# Altium PCB modular_pcb.PcbDoc
Units mil, origin at the board's own origin, x right, y up, seen from the top; angles counter-clockwise.
Board outline 1680 x 2735 mil, 2 copper layers (Top Layer, Bottom Layer); 66 components, 32 nets, 199 pads, 254 vias.
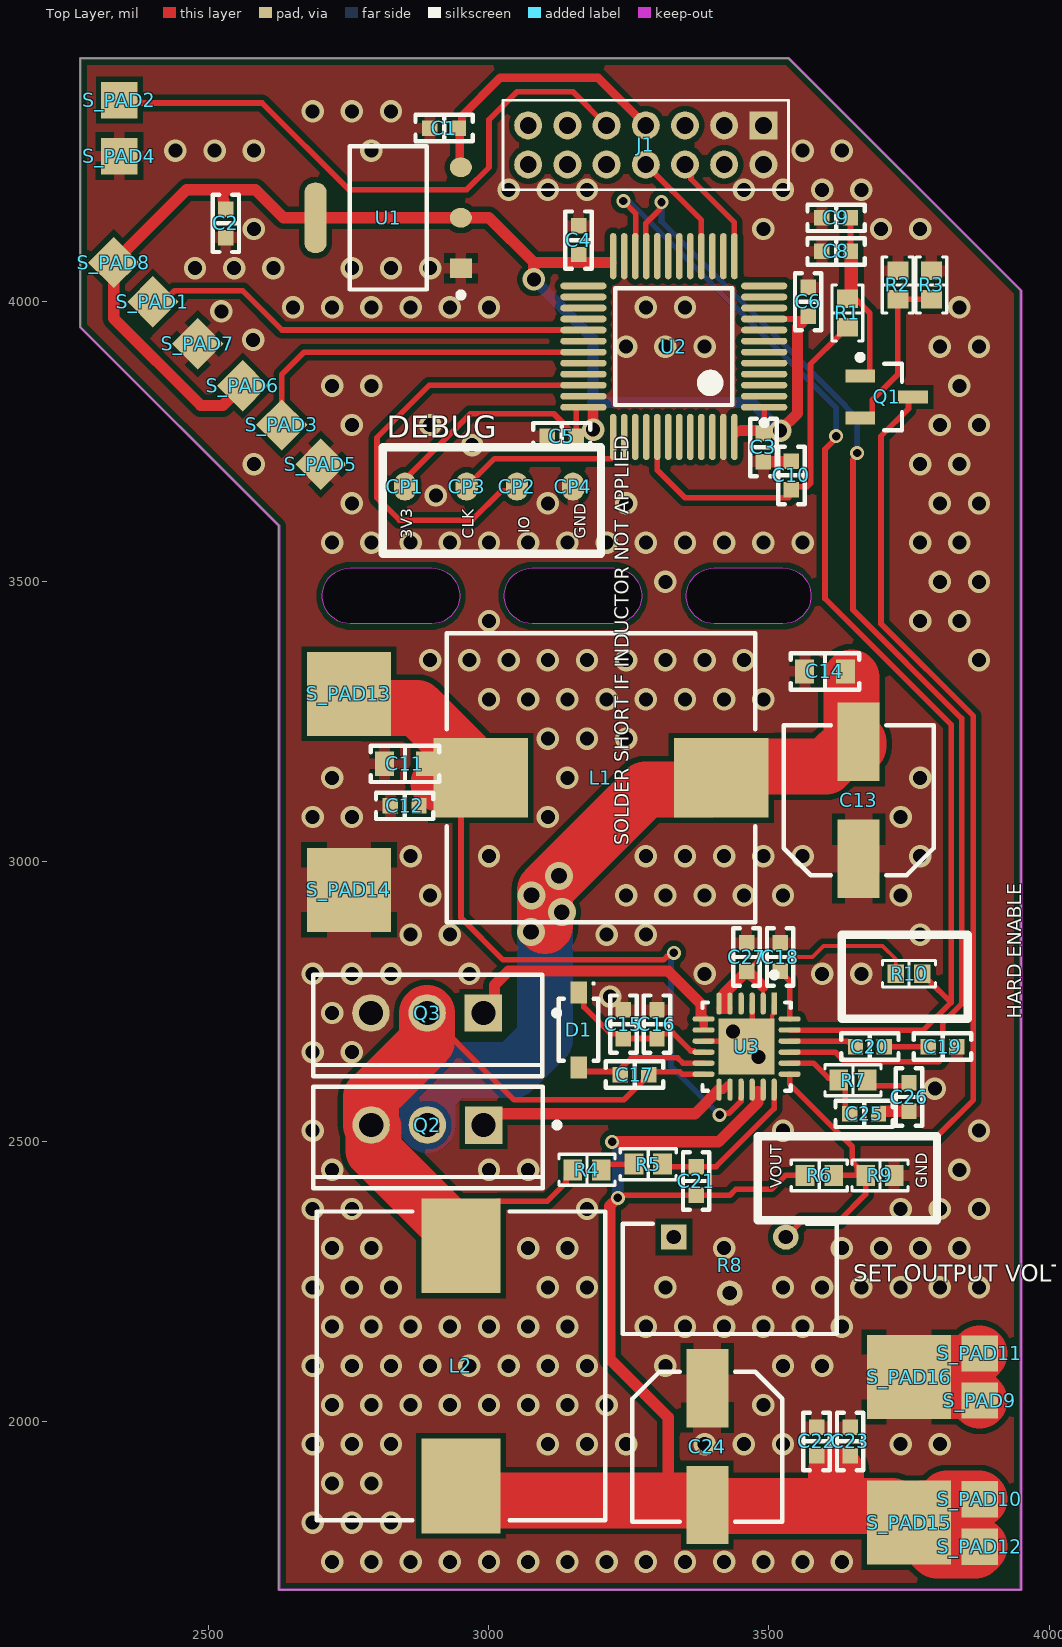
[diagram p0: Top Layer view]
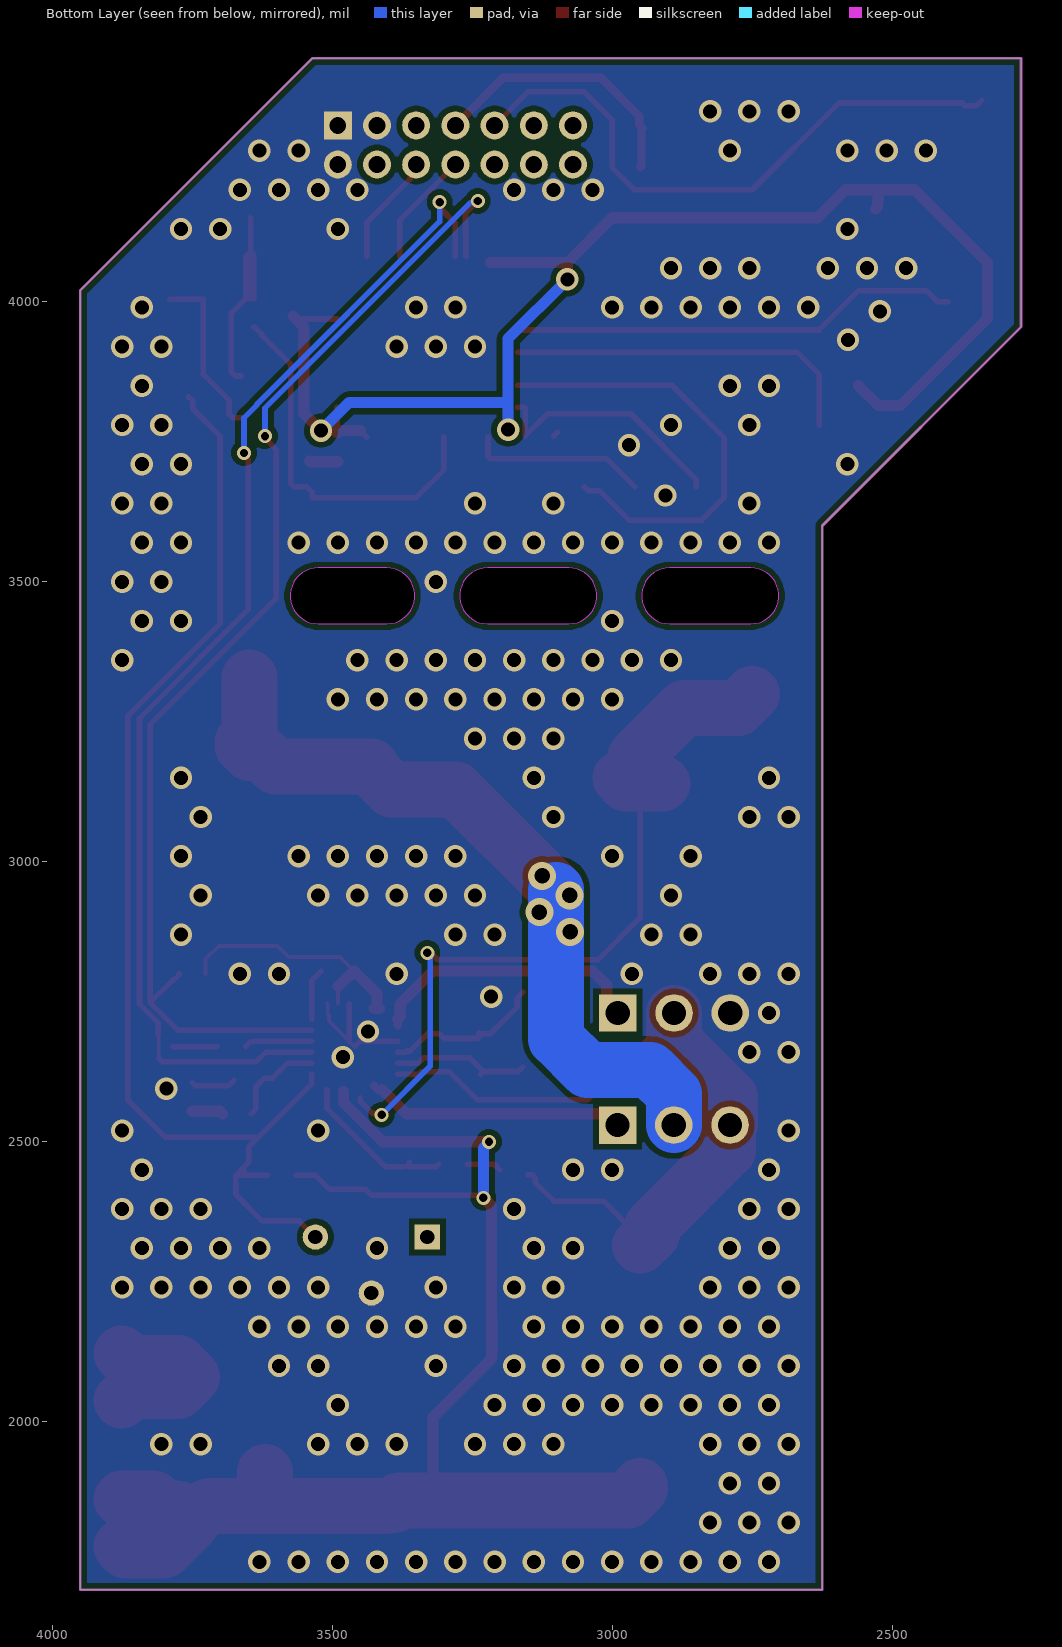
[diagram p1: Bottom Layer view, seen from below]
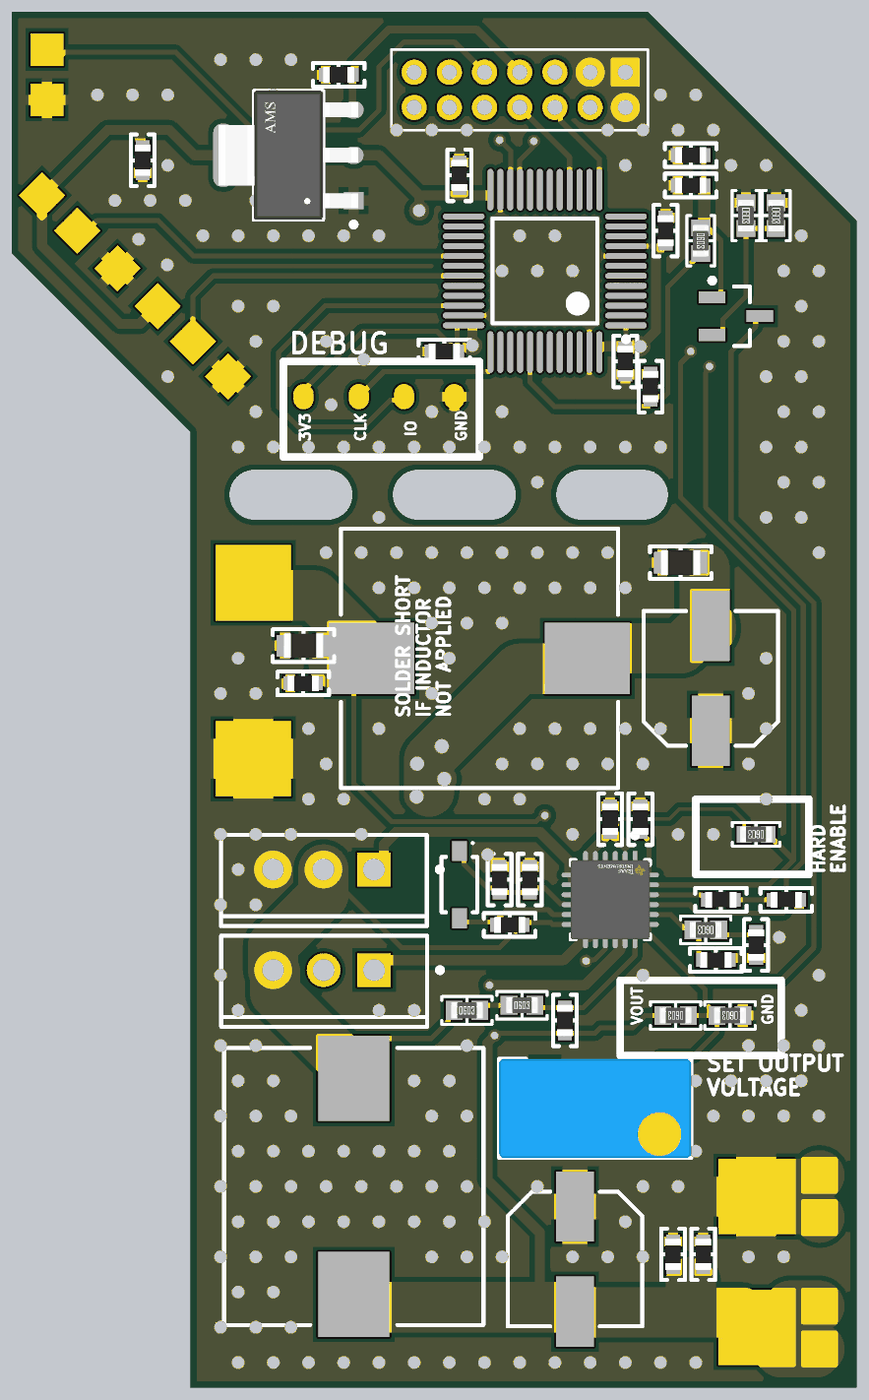
[diagram p2: 3D render of the assembled board from above, using the file's embedded part models]

## Layer stack, top to bottom
Top Solder: solder mask 0.4, Solder Resist, Dk 3.5
Top Layer: signal copper 1.4
Dielectric 1: dielectric 12.6, FR-4, Dk 4.8
Bottom Layer: signal copper 1.4
Bottom Solder: solder mask 0.4, Solder Resist, Dk 3.5

## Board outline
2270,3955 2270,4435 3535,4435 3950,4020 3950,3415 3950,1700 2625,1700 2625,3600
cut-out: 2752.5,3425 cw(c2752.5,3475) 2752.5,3525 2897.5,3525 cw(c2897.5,3475) 2897.5,3425
cut-out: 3077.5,3425 cw(c3077.5,3475) 3077.5,3525 3222.5,3525 cw(c3222.5,3475) 3222.5,3425
cut-out: 3402.5,3425 cw(c3402.5,3475) 3402.5,3525 3525,3525 cw(c3525,3475) 3525,3425

## Design rules (kind name [scope] priority, off if disabled: settings)
Clearance [All] p1: gap=10 ignorepadtopadclearanceinfootprint=TRUE except(5: Arc-Arc Arc-Track Track-Track SMDPad-SMDPad SMDPad-THPad; 8: Arc-SMDPad Track-SMDPad; 13: Arc-THPad Track-THPad; 15: Via-Via)
PolygonConnect CAPACITORS [All vs HasFootprint('CAPAE7266X80M')] p1: thpad.connectstyle=Relief thpad.reliefconductorwidth=10 thpad.reliefentries=4 thpad.polygonreliefangle="90 Angle" thpad.airgapwidth=10 smdpad.connectstyle=Relief smdpad.reliefconductorwidth=50 smdpad.reliefentries=4 smdpad.polygonreliefangle="90 Angle" smdpad.airgapwidth=10 via.connectstyle=Relief via.reliefconductorwidth=10 via.reliefentries=4 via.polygonreliefangle="90 Angle" via.airgapwidth=10
PolygonConnect POWER_PADS [All vs HasFootprint('POWER_PAD')] p2: thpad.connectstyle=Relief thpad.reliefconductorwidth=10 thpad.reliefentries=4 thpad.polygonreliefangle="90 Angle" thpad.airgapwidth=10 smdpad.connectstyle=Relief smdpad.reliefconductorwidth=80 smdpad.reliefentries=4 smdpad.polygonreliefangle="90 Angle" smdpad.airgapwidth=10 smdpad.conductorbypadedge=TRUE smdpad.mindistance=15 smdpad.enablemindistance=FALSE via.connectstyle=Relief via.reliefconductorwidth=10 via.reliefentries=4 via.polygonreliefangle="90 Angle" via.airgapwidth=10
PolygonConnect general [All] p3: thpad.connectstyle=Direct thpad.reliefconductorwidth=50 thpad.reliefentries=4 thpad.polygonreliefangle="90 Angle" thpad.airgapwidth=10 smdpad.connectstyle=Relief smdpad.reliefconductorwidth=20 smdpad.reliefentries=4 smdpad.polygonreliefangle="90 Angle" smdpad.airgapwidth=10 via.connectstyle=Direct via.reliefconductorwidth=50 via.reliefentries=4 via.polygonreliefangle="90 Angle" via.airgapwidth=10
RoutingVias [All] p1: holewidth=12 width=25 viastyle="Through Hole" minholewidth=12 minwidth=20 maxholewidth=70 maxwidth=100
SolderMaskExpansion [All] p1: expansion=4 istentingtop=FALSE
SupplyNets "Schematic Supply Nets" [InNet('VOUT')] p1: voltage=0.000
SupplyNets "Schematic Supply Nets_3" [InNet('GND')] p2: voltage=0.000
SupplyNets "Schematic Supply Nets_7" [InNet('VIN')] p3: voltage=0.000
SupplyNets "Schematic Supply Nets_2" [InNet('3V3')] p4: voltage=0.000
SupplyNets "Schematic Supply Nets_1" [InNet('5V')] p5: voltage=0.000
Width [All] p1: maxlimit=100 minlimit=5 preferedwidth=10 minimp=50.000000 maximp=50.000000 favimp=50.000000
30 further rules are at their usual default settings.

## Classes and differential pairs
component class only_converter: C11 C12 C13 C14 C15 C16 C17 C18 C19 C20 C21 C22 C23 C24 C25 C26 C27 D1 L1 L2 Q2 Q3 R4 R5 R6 R7 R8 R9 R10 S_PAD13 S_PAD14 S_PAD15 S_PAD16 U3
component class BTT_toolhead_expansion: C1 C2 C3 C4 C5 C6 C8 C9 C10 CP1 CP2 CP3 CP4 J1 Q1 R1 R2 R3 S_PAD1 S_PAD2 S_PAD3 S_PAD4 S_PAD5 S_PAD6 S_PAD7 S_PAD8 S_PAD9 S_PAD10 S_PAD11 S_PAD12 U1 U2

## Components (designator, comment, footprint, x,y, rotation, side; value= is the part's Value field where it differs from the comment)
C1 "Capacitor" "CAP FILM 0603_1608" 2920,4310 r0 top value=10u
C2 "Capacitor" "CAP FILM 0603_1608" 2530,4140 r90 top value=10u
C3 "Capacitor" "CAP FILM 0603_1608" 3490,3740 r270 top value=100n
C4 "Capacitor" "CAP FILM 0603_1608" 3160,4110 r90 top value=1p
C5 "Capacitor" "CAP FILM 0603_1608" 3130,3760 r180 top value=100n
C6 "Capacitor" "CAP FILM 0603_1608" 3570,4000 r90 top value=100n
C8 "Capacitor" "CAP FILM 0603_1608" 3620,4090 r0 top value=100n
C9 "Capacitor" "CAP FILM 0603_1608" 3620,4150 r0 top value=1u
C10 "Capacitor" "CAP FILM 0603_1608" 3540,3690 r270 top value=100n
C11 "Capacitor" "CAP FILM 0805" 2850,3175 r0 top value=10u
C12 "Capacitor" "CAP FILM 0603_1608" 2849.41,3100 r0 top value=470n
C13 "Capacitor" CAPAE7266X80M 3660,3110 r90 top value=150u
C14 "Capacitor" "CAP FILM 0805" 3600,3340 r0 top value=10u
C15 "Capacitor" "CAP FILM 0603_1608" 3240,2710 r270 top value=1u
C16 "Capacitor" "CAP FILM 0603_1608" 3300,2710 r270 top value=1u
C17 "Capacitor" "CAP FILM 0603_1608" 3260,2620 r180 top value=100n
C18 "Capacitor" "CAP FILM 0603_1608" 3520,2830 r270 top value=100n
C19 "Capacitor" "CAP FILM 0603_1608" 3810,2670 r180 top value=100n
C20 "Capacitor" "CAP FILM 0603_1608" 3680,2670 r180 top value=100n
C21 "Capacitor" "CAP FILM 0603_1608" 3370,2430 r270 top value=470n
C22 "Capacitor" "CAP FILM 0603_1608" 3585,1965 r270 top value=10u
C23 "Capacitor" "CAP FILM 0603_1608" 3645,1965 r270 top value=10u
C24 "Capacitor" CAPAE7266X80M 3390,1955.67 r270 top value=150u
C25 "Capacitor" "CAP FILM 0603_1608" 3670,2550 r180 top value=10p
C26 "Capacitor" "CAP FILM 0603_1608" 3750,2580 r90 top value=1n
C27 "Capacitor" "CAP FILM 0603_1608" 3460,2830 r270 top value=100n
CP1 "CONNECT_PAD" ROUND_SMALL 2850,3670 r180 top
CP2 "CONNECT_PAD" ROUND_SMALL 3050,3670 r180 top
CP3 "CONNECT_PAD" ROUND_SMALL 2960,3670 r180 top
CP4 "CONNECT_PAD" ROUND_SMALL 3150,3670 r180 top
D1 "Zener Diode" SODFL375X135-2N 3160,2700 r270 top
J1 "BTT header 2x7" "BTT connector 2x7 THT" 3490,4315 r270 top
L1 "Inductor" INDP135128X65N 3200,3150 r0 top value=2.2u
L2 "Inductor" INDP135128X65N 2950,2100 r270 top value=2.2u
Q1 "BSS806N" INF-PG-SOT23_M 3710,3830 r0 top
Q2 "STP80NF55-06" STM-TO-220A-3 2890,2530 r270 top
Q3 "STP80NF55-06" STM-TO-220A-3 2889.61,2730 r270 top
R1 "Resistor" "RES 0603_1608" 3640,3980 r270 top value=470R
R2 "Resistor" "RES 0603_1608" 3730,4030 r270 top value=999M
R3 "Resistor" "RES 0603_1608" 3790,4030 r270 top value=360R
R4 "Resistor" "RES 0603_1608" 3175,2450 r0 top value=1K
R5 "Resistor" "RES 0603_1608" 3284.41,2460 r0 top value=1K
R6 "Resistor" "RES 0603_1608" 3590,2440 r180 top value=12k
R7 "Resistor" "RES 0603_1608" 3650,2610 r180 top value=3.48K
R8 "T93YB103KT20" FP-T93YB-MFG 3430,2255.2 r90 top
R9 "Resistor" "RES 0603_1608" 3698.13,2440 r180 top value=6k
R10 "Resistor" "RES 0603_1608 RF" 3750,2800 r180 top value=1K
S_PAD1 "SOLDER_PAD" PAD_SQUARE 2400,4000 r45 top
S_PAD2 "SOLDER_PAD" PAD_SQUARE 2340,4360 r90 top
S_PAD3 "SOLDER_PAD" PAD_SQUARE 2630,3780 r45 top
S_PAD4 "SOLDER_PAD" PAD_SQUARE 2340,4260 r90 top
S_PAD5 "SOLDER_PAD" PAD_SQUARE 2700,3710 r45 top
S_PAD6 "SOLDER_PAD" PAD_SQUARE 2560,3850 r45 top
S_PAD7 "SOLDER_PAD" PAD_SQUARE 2480,3925 r45 top
S_PAD8 "SOLDER_PAD" PAD_SQUARE 2330,4070 r45 top
S_PAD9 "SOLDER_PAD" PAD_SQUARE 3876,2038 r90 top
S_PAD10 "SOLDER_PAD" PAD_SQUARE 3876,1862 r180 top
S_PAD11 "SOLDER_PAD" PAD_SQUARE 3876,2122 r180 top
S_PAD12 "SOLDER_PAD" PAD_SQUARE 3876,1777 r180 top
S_PAD13 "SOLDER_PAD" POWER_PAD 2750,3300 r90 top
S_PAD14 "SOLDER_PAD" POWER_PAD 2750,2950 r90 top
S_PAD15 "SOLDER_PAD" POWER_PAD 3750,1820 r180 top
S_PAD16 "SOLDER_PAD" POWER_PAD 3750,2080 r180 top
U1 "AMS1117-3.3" FP-AMS1117-IPC_C 2820,4150 r180 top
U2 "STM32F103C6T6A" STM-LQFP48_M 3330,3920 r180 top
U3 "LM25141QRGERQ1" FP-RGE0024J-IPC_A 3460,2670 r270 top

## Footprints (in the part's own frame and the unit in brackets; to place one, negate y for a bottom-side part, rotate by r counter-clockwise, add the part's x,y. Pads: shape width x height; smd on the part's side, far side on the other; paste and mask are expansions set on the pad)
"BTT connector 2x7 THT" [mil]
  rect 50x50 hole 30: 1(0,0)
  round 50 hole 30: 2(0,-70) 3(0,-140) 4(0,-210) 5(0,-280) 6(0,-350) 7(0,-420) 8(70,-420) 9(70,-350) 10(70,-280) 11(70,-210) 12(70,-140) 13(70,-70) 14(70,0)
  silkscreen extent -45,-465 115,45
"CAP FILM 0603_1608" [mm] "Chip Capacitor, 2-Leads, Body 1.60x0.80mm, IPC Medium Density"
  rect 0.7x0.7 smd: 1(-0.65,0) 2(0.65,0)
  silkscreen extent -1.3,-0.6 1.3,0.6, body extent -0.8,-0.4 0.8,0.4, height 0.7
"CAP FILM 0805" [mm] "J2, Film Capacitor PPS , 2-Leads, Body 2.00x1.25mm, IPC Medium Density"
  rect 0.85x1.1 smd: 1(-0.925,0) 2(0.925,0)
  silkscreen extent -1.55,-0.82 1.55,0.82, body extent -1,-0.62 1,0.62, height 1.2
CAPAE7266X80M [mm] "Aluminum Electrolytic Capacitor, Body 6.60x6.60x8.00mm, IPC Low Density"
  rect 3.55x1.9 smd: 1(-2.65,0) 2(2.65,0)
  silkscreen extent -3.4,-3.4 3.4,3.4, body extent -3.4,-3.4 3.4,3.4, height 8
FP-AMS1117-IPC_C [mm]
  rect 1.004x0.872 smd paste+0 mask+0: 1(-3.295,2.29)
  rrect100% 1.004x0.872 smd paste+0 mask+0: 2(-3.295,0) 3(-3.295,-2.29)
  rrect87% 1.004x3.182 smd paste+0 mask+0: 4(3.295,0)
  silkscreen extent -3.42,-3.25 1.75,3.62, body extent -3.9,-3.35 3.9,3.35, height 0.25
FP-RGE0024J-IPC_A [mm]
  rect 1.01x0.242 smd paste+0 mask+0: 1(-1.951,1.25)
  rrect100% 1.01x0.242 smd paste+0 mask+0: 2(-1.951,0.75) 3(-1.951,0.25) 4(-1.951,-0.25) 5(-1.951,-0.75) 6(-1.951,-1.25) 13(1.951,-1.25) 14(1.951,-0.75) 15(1.951,-0.25) 16(1.951,0.25) 17(1.951,0.75) 18(1.951,1.25)
  rrect100% 0.242x1.01 smd paste+0 mask+0: 7(-1.25,-1.951) 8(-0.75,-1.951) 9(-0.25,-1.951) 10(0.25,-1.951) 11(0.75,-1.951) 12(1.25,-1.951) 19(1.25,1.951) 20(0.75,1.951) 21(0.25,1.951) 22(-0.25,1.951) 23(-0.75,1.951) 24(-1.25,1.951)
  rect 2.55x2.55 smd paste-1000 mask+0: 25(0,0)
  silkscreen extent -3.38,-2 2,2, body extent -2.96,-2.96 2.96,2.96, height 0.25
FP-T93YB-MFG [mm]
  rect 1.15x1.15 hole 0.65 paste-2539.97 mask+0: 1(1.9,2.54)
  round 1.15 hole 0.65 paste-2539.97 mask+0: 2(-0.64,0) 3(1.9,-2.54)
  silkscreen extent -2.5,-4.85 2.5,4.85, body extent -2.6,-4.95 2.6,4.95, height 0.25
INDP135128X65N [mm] "Precision Wire Wound Inductor, 2-Leads, Body 13.50x12.75mm, IPC Medium Density"
  rect 4.3x3.6 smd: 1(-5.45,0) 2(5.45,0)
  silkscreen extent -7,-6.55 7,6.55, body extent -7,-6.55 7,6.55, height 6.5
INF-PG-SOT23_M [mm] "SOT23, 3-Leads, Body 2.9x1.3mm, Pitch 0.95mm, IPC Low Density"
  rect 1.35x0.6 smd: 1(-1.2,0.95) 2(-1.2,-0.95) 3(1.2,0)
  silkscreen extent -1.32,-1.5 0.7,1.92, body extent -0.7,-1.5 0.7,1.5, height 1.1
PAD_SQUARE [mil]
  rect 65x65 smd paste-99999: 1(0,0)
POWER_PAD [mil]
  rect 150x150 smd paste-99999: 1(0,0)
"RES 0603_1608" [mm] "Chip Resistor, 2-Leads, Body 1.60x0.80mm, IPC Medium Density"
  rect 0.85x0.95 smd: 1(-0.65,0) 2(0.65,0)
  silkscreen extent -1.27,-0.7 1.27,0.7, body extent -0.8,-0.4 0.8,0.4, height 0.45
"RES 0603_1608 RF" [mm] "Chip Resistor, 2-Leads, Body 1.60x0.80mm, IPC High Density"
  rect 0.75x0.85 smd: 1(-0.6,0) 2(0.6,0)
  silkscreen extent -1.2,-0.6 1.2,0.6, body extent -0.8,-0.4 0.8,0.4, height 0.45
ROUND_SMALL [mil]
  oval 40x50 smd paste-99999: 1(0,0)
SODFL375X135-2N [mm] "SODFL, 2-Leads, Body 1.60x3.75mm, IPC Medium Density"
  rect 1x0.75 smd: 1(-1.7,0) 2(1.7,0)
  silkscreen extent -2.15,-0.9 1.4,0.9, body extent -1.4,-0.9 1.4,0.9, height 1.35
STM-LQFP48_M [mm] "QFP, 48-Leads, Body 7x7mm, Pitch 0.5mm, IPC Low Density"
  oval 2.1x0.3 smd: 1(-4.1,2.75) 2(-4.1,2.25) 3(-4.1,1.75) 4(-4.1,1.25) 5(-4.1,0.75) 6(-4.1,0.25) 7(-4.1,-0.25) 8(-4.1,-0.75) 9(-4.1,-1.25) 10(-4.1,-1.75) 11(-4.1,-2.25) 12(-4.1,-2.75) 25(4.1,-2.75) 26(4.1,-2.25) 27(4.1,-1.75) 28(4.1,-1.25) 29(4.1,-0.75) 30(4.1,-0.25) 31(4.1,0.25) 32(4.1,0.75) 33(4.1,1.25) 34(4.1,1.75) 35(4.1,2.25) 36(4.1,2.75)
  oval 0.3x2.1 smd: 13(-2.75,-4.1) 14(-2.25,-4.1) 15(-1.75,-4.1) 16(-1.25,-4.1) 17(-0.75,-4.1) 18(-0.25,-4.1) 19(0.25,-4.1) 20(0.75,-4.1) 21(1.25,-4.1) 22(1.75,-4.1) 23(2.25,-4.1) 24(2.75,-4.1) 37(2.75,4.1) 38(2.25,4.1) 39(1.75,4.1) 40(1.25,4.1) 41(0.75,4.1) 42(0.25,4.1) 43(-0.25,4.1) 44(-0.75,4.1) 45(-1.25,4.1) 46(-1.75,4.1) 47(-2.25,4.1) 48(-2.75,4.1)
  silkscreen extent -4.23,-2.65 2.65,3.57, body extent -3.5,-3.5 3.5,3.5, height 1.6
STM-TO-220A-3 [mm] "FM, 3-Leads, Body 10.4x4.6mm, Pitch 2.55mm"
  rect 1.7x1.7 hole 1.1: 1(0,2.55)
  round 1.7 hole 1.1: 2(0,0) 3(0,-2.55)
  silkscreen extent -1.74,-5.18 2.86,6, body extent -1.74,-5.18 2.86,5.23, height 19.68

## Part data
C11 C14 C22 C23: "Daj tu ten wiekszy 0805 dzbanie", SimulationGenericComponent=True
C13 C24: "to ten duzy elektrolityczny smd", SimulationGenericComponent=True
Q1: library part CMP-1149-00036-1, "N-Channel OptiMOS 2 Small-Signal-Transistor, 20 V VDS, 2.3 A ID, -55 to 150 degC, PG-SOT23, Reel, Green", Manufacturer=Infineon, ComponentLink1Description="Manufacturer URL", ComponentLink1URL=http://www.infineon.com/, ComponentLink2Description=Datasheet, ComponentLink2URL=http://www.infineon.com/dgdl/BSS806N_Rev2.3_.pdf?folderId=db3a3043156fd573011622e10b5c1f67&fileId=db3a304330f686060131185f0553451c, ComponentLink3Description="Package Specification", ComponentLink3URL=http://www.infineon.com/dgdl/SOT23-Package_Overview.pdf?folderId=db3a30431936bc4b0119532290053c66&fileId=db3a30431936bc4b0119533468123c85, DatasheetVersion="Rev. 2.3", Green=TRUE, Halogen-free=TRUE, ID (max)="2.3Â A", IDpuls (max)="9.3Â A", Mounting Technology="Surface Mount", PackageDescription="3-Pin Small Outline Transistor Package, 2.9 x 1.3 mm Body, 0.95 mm Pitch", PackageReference=PG-SOT23, PackageVersion=Apr-08, Packing=Reel, PartNumber=BSS806N, Ptot (max)="0.5Â W", QG="1.7Â nC", RDS (on) (max)="57 mOhm", RDS (on) (max) (@1.8V)="82 mOhm", RDS (on) (max) (@2.5V)="57 mOhm", RthJA (max)="250 K/W", VDS (max)="20 V", VGS(th) (max)="0.75Â V", VGS(th) (min)="0.3Â V"
Q2 Q3: library part CMP-2000-07168-1, "N-Channel STripFET(TM) II Power MOSFET, 55 V, 80 A, 5 mOhm, -55 to 175 degC, 3-Pin TO-220, RoHS, Tube", Manufacturer=STMicroelectronics, Maximum Continuous Drain Current=80A, Maximum Drain Source Resistance=0.007Ω, Maximum Drain Source Voltage=55V, Maximum Gate Source Voltage=±20V, Maximum Gate Threshold Voltage=4V, Maximum Operating Temperature=+175°C, Maximum Power Dissipation=300W, Minimum Gate Threshold Voltage=2V, Minimum Operating Temperature=-55°C, Package Description="3-Pin Transistor Outline Package, 10.2 x 4.5 mm, Pitch 2.55 mm", Package Reference=TO-220, Typical Input Capacitance @ Vds=4400pF@25V, Category=PowerMOSFET, Channel Mode=Enhancement, Channel Type=N, Datasheet URL=http://www.st.com/content/ccc/resource/technical/document/datasheet/f1/46/49/9e/39/8f/49/aa/CD00002670.pdf/files/CD00002670.pdf/jcr:content/translations/en.CD00002670.pdf, Datasheet Version="Rev. 8, 10/2006", Dimensions=10.4x4.6x9.15mm, Height=9.15mm, Length=10.4mm, Manufacturer URL=http://www.st.com/, Mounting Technology=ThroughHole, Mounting Type=ThroughHole, Number of Elements per Chip=1, Package Type=TO-220, Package URL=http://www.st.com/st-web-ui/static/active/en/resource/technical/document/datasheet/CD00000544.pdf, Pin Count=3, Transistor Configuration=Single, Transistor Material=Si, Typical Gate Charge @ Vgs=142nC@10V, Typical Turn-Off Delay Time=125ns, Typical Turn-On Delay Time=27ns, Width=4.6mm
R8: library part CMP-00030-39738570-1, "T93YB103KT20 Resistor Trimmer, Cermet, 10 kOhm, ± 10%, 500 mW, 23 Turn, Multi Turn, Through Hole", Max Operating Temperature=125°C, Max Power Dissipation=500mW, Min Operating Temperature=-55°C, Resistance=10kΩ, Temperature Coefficient=100ppm/°C, Tolerance=10%, Voltage Rating=250V, Composition=Cermet, Depth=5mm, Height=9.8044mm, Lead Free="Lead Free", Length=9.7028mm, Military Standard=Not, Mount="PCB, Through Hole", NexarPartId=39738570, Number of Turns=21, Power Rating=500mW, Radiation Hardening=No, REACH SVHC=Unknown, RoHS=Compliant, Schedule B="8533400080, 8533400080", Taper=Linear, Termination=Pin, Voltage Rating (DC)=250V, Weight=820.009956mg, Width=5.0038mm
U1: library part CMP-209535-000001-1, "LDO Voltage Regulators 1A, 3.3V", Dropout Voltage=1.1V, Manufacturer="Advanced Monolithic Systems", Max Junction Temp=+125°C, Max Power Dissipation=1.2W, Max Supply Voltage=15V, Nominal Supply Current=5mA, Output Current=1A, Output Voltage=3.3V, Package=AMS1117, Temperature="-40°C to +125°C", Temperature Range Low=-40°C, Automotive=No, Category=IC, ComponentLink2Description=Datasheet, ComponentLink2URL=http://www.advanced-monolithic.com/pdf/ds1117.pdf, Device Class L1="Integrated Circuits (ICs)", Device Class L2="Power Management ICs", Device Class L3="Voltage Regulators - Linear", Height=1.8mm, Ipc Land Pattern Name=SOT229P700X180-4, Lead Free=Yes, Manufacturer Part Number=AMS1117-3.3, Number Of Outputs=1, Octopart=https://octopart.com/ams1117-3.3-advanced+monolithic+systems-25899300, Output Type=Fixed, RoHS=TRUE, Standoff Height=0.64mm, Temperature Range High=+125°C
U2: library part CMP-0237-00254-3, "ARM Cortex-M3 32-bit MCU, 32 KB Flash, 10 KB Internal RAM, 37 I/Os, 48-pin LQFP, -40 to 85 degC, Tray", I/Os (High Current)=37, Operating Frequency(F) (Processor speed) (MHz)=72, Supply Voltage(Vcc) min (V)=2, A/D Converter="2x12-bit (10 Channel)", ComponentLink1Description="Manufacturer URL", ComponentLink1URL=http://www.st.com/web/en/home.html, ComponentLink2Description=Datasheet, ComponentLink2URL=http://www.st.com/st-web-ui/static/active/en/resource/technical/document/datasheet/CD00210843.pdf, ComponentLink3Description="Package Specification", ComponentLink3URL=http://www.st.com/st-web-ui/static/active/en/resource/technical/document/datasheet/DM00058181.pdf, Core="ARM Cortex-M3", DatasheetVersion="Rev. 6", FLASH Size (Prog) (kB)=32, Internal RAM Size (kB)=10, Mounting Technology="Surface Mount", PackageDescription="48-Pin Low Profile Quad Flat Package, 7 x 7 mm Body, 0.5 mm Pitch", PackageReference=LQFP48, PackageVersion="Rev. 6, 06/2013", Packing=Tray, PartNumber=STM32F103C6T6A
U3: library part CMP-04918-000466-1, "AUTOMOTIVE, 2.2MHZ, LOW IQ SYNCH", Max Operating Temperature=125°C, Min Operating Temperature=-40°C
C1 C2 C3 C4 C5 C6 C8 C9 C10 C12 C15 C16 C17 C18 C19 C20 C21 C25 C26 C27 L1 L2: SimulationGenericComponent=True
D1: AF=1, BV=100, BV_MAX=1e99, CJO=0, CJP=0, CTA=0, CTP=0, EG=1.11, FC=0.5, FCS=0.5, FV_MAX=1e99, IBV=0.001, IKF=0, IKR=0, IS=1e-14, ISR=1e-14, JSW=0, JTUN=0, JTUNSW=0, KEG=1, KF=0, LEVEL=1, MJSW=0.33, N=1, NBV=1, NR=1, NS=1, NTUN=30, PHP=1, RS=0, SimulationGenericComponent=True, TCV=0, TLEV=0, TLEVC=0, TM1=0, TM2=0, TNOM=27, TPB=0, TPHP=0, TRS=0, TRS2=0, TT=0, TTT1=0, TTT2=0, VJ=1, XTI=3, XTITUN=3
R1 R2 R3 R4 R5 R6 R7 R9 R10: SimulationGenericComponent=True, TC1=0, TC2=0

## Via types
v1: diameter 40, hole 25, Top Layer to Bottom Layer, tented both sides, 242 vias
v2: diameter 25, hole 15, Top Layer to Bottom Layer, tented both sides, 8 vias
v3: diameter 50, hole 28, Top Layer to Bottom Layer, tented both sides, 4 vias

## Nets (pads, with @x,y where several pads share a name; then routed paths per layer and width w, separated by ;. In a path a pad name is that pad's centre, name@x,y a point inside that pad or via, vN(x,y) a via of type N, cw(c..) or ccw(c..) an arc to the next point about the centre after c; other vN are vias at no path point)
3V3: C2.2 C3.1 C4.1 C5.1 C6.1 CP1.1 S_PAD6.1 S_PAD8.1 U1.2 U1.4 U2.1 U2.9 U2.24 U2.36 U2.48 | length 3051
  Top Layer w10: CP1.1 2850,3683.12 2966.88,3800 3115.59,3800 C5.1 3155.59,3810.9 3156.43,3811.73 U2.36 ; U2.48 3438.58,3758.58 3450,3770 ; C3.1@3491.42,3770 U2.1 ; U2.9 C6.1@3563.62,3969.21
  Top Layer w20: C2.2 2526.22,4169.37 2526.22,4180.5 2525,4181.72 2525,4200 ; S_PAD6.1 2524.58,3814.58 2485.42,3814.58 2330,3970 S_PAD8.1 2460,4200 2525,4200 ; v1(3080,4040) 3080,4070 ; v1(3185.83,3771.64) U2.36@3185.83,3806.34 ; U2.24@3217.51,4070 3080,4070 ; 3450,3770 C3.1@3491.42,3770 ; C3.1 3491.42,3767.01 C3.1@3491.42,3770 ; C6.1 3550.76,3955.17 3550.76,3800.76 v1(3520,3770) C3.1@3491.42,3770 ; 2525,4200 2583.03,4200 2633.03,4150 U1.4 U1.2 3000,4150 3080,4070
  Bottom Layer w20: v1(3080,4040) 3185.83,3934.17 3185.83,3820 ; v1(3185.83,3771.64) 3185.83,3820 ; v1(3520,3770) 3470,3820 3185.83,3820
5V: C1.2 J1.4 U1.3 | length 487.6
  Top Layer w15: U1.3 2947.66,4242.22 2947.66,4307.93 C1.2 2951.87,4316.28 2951.87,4331.87 3020,4400 3195,4400 J1.4
COMP: C25.2 R7.2 U3.20 | length 168.5
  Top Layer w10: U3.20 3579.53,2640.47 3606.3,2613.7 3620.71,2613.7 3636.14,2598.27 3636.14,2558.27 C25.2
CS: C21.1 R5.2 U3.18 | length 303.2
  Top Layer w7: C21.1@3362.39,2453.3 3362.39,2463.2 3365.61,2459.98 C21.1 C21.1@3364.68,2455.59
  Top Layer w10: R5.2 3314.41,2455.59 3361.22,2455.59 3362.39,2456.76 C21.1@3362.39,2463.2 ; C21.1 3405.59,2455.59 3509.21,2559.21 U3.18
EN: R10.1 U2.22 U3.23 | length 2186.8
  Top Layer w10: v2(3240,4180) 3261.88,4158.12 3261.88,4118.91 3261.45,4118.48 3261.45,4081.76 U2.22 ; U3.23 3776.14,2699.53 3825.12,2748.5 ; v2(3620,3760) 3620,3756.64 3600,3736.64 3600,3470 3825.12,3244.88 3825.12,2748.5 ; R10.1 3773.62,2798.03 3783.39,2788.27 3785.35,2788.27 3825.12,2748.5
  Bottom Layer w10: v2(3240,4180) 3242.87,4177.13 3252.87,4177.13 3620,3810 v2(3620,3760)
FB: Q1.3 R6.1 R8.3 R9.2 U3.19 | length 2125
  Top Layer w10: R8.3 3558.91,2358.91 3625.15,2358.91 3672.54,2406.3 R9.2 ; U3.19 3536.82,2603.18 3632.21,2507.79 ; R6.1 R9.2@3657.8,2440 ; Q1.3 3755.86,3830 3749.05,3823.19 3749.05,3809.05 3700,3760 3700,3425 3865,3260 3865,2575 3797.79,2507.79 3632.21,2507.79 ; 3632.21,2507.79 3648.64,2491.36 3648.64,2463.9 R9.2@3657.8,2454.74 ; R9.2@3657.8,2440 R9.2@3657.8,2454.74 ; R9.2@3657.8,2440 R9.2 ; R9.2@3657.8,2454.74 R9.2
GND: C1.1 C2.1 C3.2 C4.2 C5.2 C6.2 C8.1 C9.1 C10.1 C11.1 C12.1 C13.1 C14.1 C15.1 C16.1 C18.1 C19.1 C22.1 C23.1 C24.1 C25.1 C26.1 C27.1 CP4.1 J1.1 J1.2 J1.14 Q3.3 R2.1 R3.1 R8.2 R9.1 S_PAD4.1 S_PAD5.1 S_PAD7.1 S_PAD9.1 S_PAD11.1 S_PAD14.1 S_PAD16.1 U1.1 U2.8 U2.23 U2.35 U2.47 U3.1 U3.3 U3.9 U3.25 | length 648.8
  Top Layer w7: U3.25 3469.84,2679.84 3505.45,2715.45 3505.45,2725.95 3507.94,2728.45 3507.94,2745.55 U3.1
  Top Layer w10: C5.2@3097.23,3767.18 C5.2 ; U3.9 3450.16,2679.84 U3.25 ; U3.25@3469.84,2679.84 U3.3
  Top Layer w20: C3.2 3538.82,3714.41 C10.1 ; C25.1 3700,2554.41 C26.1
  Top Layer w100: S_PAD9.1 3859,2055 3775,2055 S_PAD16.1 3775,2105 3859,2105 S_PAD11.1
  other v1: 2720,1750 2790,1750 2860,1750 2930,1750 3000,1750 3070,1750 3140,1750 3210,1750 3280,1750 3350,1750 3420,1750 3490,1750 3560,1750 3630,1750 2685,1820 2755,1820 2825,1820 2720,1890 2790,1890 2685,1960 2755,1960 2825,1960 3105,1960 3175,1960 3245,1960 3385,1960 3455,1960 3525,1960 3735,1960 3805,1960 2720,2030 2790,2030 2860,2030 2930,2030 3000,2030 3070,2030 3140,2030 3210,2030 3490,2030 2685,2100 2755,2100 2825,2100 2895,2100 2965,2100 3035,2100 3105,2100 3175,2100 3315,2100 3525,2100 3595,2100 2720,2170 2790,2170 2860,2170 2930,2170 3000,2170 3070,2170 3140,2170 3280,2170 3350,2170 3420,2170 3490,2170 3560,2170 3630,2170 2685,2240 2755,2240 2825,2240 3105,2240 3175,2240 3315,2240 3525,2240 3595,2240 3665,2240 3735,2240 3805,2240 3875,2240 2720,2310 2790,2310 3070,2310 3140,2310 3420,2310 3630,2310 3700,2310 3770,2310 3840,2310 2685,2380 2755,2380 3175,2380 3735,2380 3805,2380 3875,2380 2720,2450 3000,2450 3070,2450 3840,2450 2685,2520 3525,2520 3875,2520 3796,2595 3481,2651 2685,2660 2755,2660 3436,2697 2720,2730 3216.22,2759.37 2685,2800 2755,2800 2825,2800 2965,2800 3385,2800 3595,2800 3665,2800 2860,2870 2930,2870 3210,2870 3280,2870 3770,2870 2895,2940 3245,2940 3315,2940 3385,2940 3455,2940 3525,2940 3735,2940 2860,3010 3000,3010 3280,3010 3350,3010 3420,3010 3490,3010 3560,3010 3770,3010 2685,3080 2755,3080 3105,3080 3735,3080 2720,3150 3140,3150 3770,3150 3105,3220 3175,3220 3245,3220 3000,3290 3070,3290 3140,3290 3210,3290 3280,3290 3350,3290 3420,3290 3490,3290 2895,3360 2965,3360 3035,3360 3105,3360 3175,3360 3245,3360 3315,3360 3385,3360 3455,3360 3875,3360 3000,3430 3770,3430 3840,3430 3315,3500 3805,3500 3875,3500 2720,3570 2790,3570 2860,3570 2930,3570 3000,3570 3070,3570 3140,3570 3210,3570 3280,3570 3350,3570 3420,3570 3490,3570 3560,3570 3770,3570 3840,3570 2755,3640 3105,3640 3245,3640 3805,3640 3875,3640 2905,3654 2580,3710 3770,3710 3840,3710 2970,3744 2755,3780 2895,3780 3805,3780 3875,3780 2720,3850 2790,3850 3840,3850 3245,3920 3315,3920 3385,3920 3805,3920 3875,3920 2579,3932 2522,3983 2650,3990 2720,3990 2790,3990 2860,3990 2930,3990 3000,3990 3280,3990 3350,3990 3840,3990 2475,4060 2545,4060 2615,4060 2755,4060 2825,4060 2895,4060 2580,4130 3490,4130 3700,4130 3770,4130 3035,4200 3105,4200 3175,4200 3455,4200 3525,4200 3595,4200 3665,4200 2440,4270 2510,4270 2580,4270 2790,4270 3560,4270 3630,4270 2685,4340 2755,4340 2825,4340
HB: C17.2 D1.2 U3.11 | length 257.1
  Top Layer w10: C17.2@3228.82,2625.59 D1.2@3167.48,2625.59 ; C17.2 3234.41,2621.18 3230,2625.59 3254.41,2650 3336.88,2650 3346.41,2640.47 U3.11 ; D1.2@3167.48,2625.59 D1.2 D1.2@3167.48,2625.59
HO: Q2.1 U3.13 U3.14 | length 463.6
  Top Layer w15: U3.13 3418.18,2593.18 3425,2600
  Top Layer w20: Q2.1 3010.39,2550 3367.61,2550 U3.13
LO: Q3.1 U3.7 U3.8 | length 501.6
  Top Layer w15: 3383.18,2708.18 3383.18,2713.7 U3.7
  Top Layer w20: Q3.1 3009.68,2749.68 3009.68,2779.68 3035,2805 3319.93,2805 3378.61,2746.31 3378.61,2723.78 U3.7
NetC8_2: C8.2 C9.2 Q1.1 R1.1 | length 499.8
  Top Layer w10: C8.2 C8.2@3645.59,4087.2 ; C9.2 C8.2@3645.59,4087.2 ; Q1.1 3673.19,3867.4 3680,3874.21 3680,3980 3654.37,4005.63 3654.37,4081.22 3648.39,4087.2 3642.8,4087.2 3640,4084.41 R1.1 3654.41,4005.59 3645.59,4014.41 C8.2@3645.59,4087.2
NetC10_2: C10.2 R1.2 U2.41 | length 676.7
  Top Layer w10: U2.41 3300.47,3699.53 3350,3650 3535.36,3650 3535.36,3659.77 3545.59,3670 3568.28,3670 3574.14,3675.86 3574.14,3888.55 3626.3,3940.71 3626.3,3942.68 3638.03,3954.41 R1.2
NetC13_2: C13.2 C14.2 L1.2 Q2.2 | length 1843.2
  Top Layer w100: 3100,2885 3100,2950 3279.13,3129.13 ; L1.2 3393.7,3129.13 3279.13,3129.13 ; L1.2@3430,3170 3601.42,3170 3625.87,3194.45 3647.4,3194.45 3660,3207.05 C13.2 3647.4,3226.93 C14.2@3647.4,3329.02 ; 3279.13,3129.13 v3(3125,2975) 3279.13,3129.13
  Bottom Layer w100: Q2.2 2890,2585.63 2932.4,2628.04 3044.06,2628.04 3100,2683.98 3100,2949.91
  other v3: 3075,2875 3130,2910 3075.84,2940.26
NetC19_2: C19.2 C20.1 | length 78.8
  Top Layer w10: C20.1 C19.2
NetC26_2: C26.2 R7.1 | length 80.9
  Top Layer w10: R7.1 3685.59,2600 3744.41,2600 C26.2
NetJ1_5: J1.5 S_PAD2.1 | length 1087.5
  Top Layer w10: S_PAD2.1 2350,4350 2370,4350 2375,4355 2595,4355 2750,4200 2960,4200 3000,4240 3000,4325 3050,4375 3150,4375 J1.5
NetJ1_11: J1.11 U2.16 | length 204.7
  Top Layer w10: J1.11 3379.21,4145.79 U2.16
NetJ1_12: J1.12 U2.13 | length 200.1
  Top Layer w10: J1.12 3350,4234.18 3360.78,4223.39 3360.78,4219.22 3438.27,4141.73 U2.13
NetQ1_2: Q1.2 R2.2 R3.2 | length 308.3
  Top Layer w10: Q1.2 3677.52,3792.6 3684.33,3799.41 3684.33,3824.33 3730,3870 R2.2 R3.2
NetR4_2: R4.2 R5.1 | length 62.4
  Top Layer w10: R4.2 3210.59,2460 R5.1
NetS_PAD1_1: S_PAD1.1 U2.29 | length 806.1
  Top Layer w10: S_PAD1.1 2418.89,4000 2438.89,4020 2560,4020 2630.47,3949.53 U2.29
NetS_PAD3_1: S_PAD3.1 U2.31 | length 645.2
  Top Layer w10: S_PAD3.1 2630,3870 2670.16,3910.16 U2.31
PG: U2.21 U3.21 | length 2162.1
  Top Layer w7: 3808.68,2648.32 3808.68,2650.44 3809.69,2651.46 3809.69,2689.79 3810.31,2690.41
  Top Layer w10: U2.21 3280.44,4081.76 3280.44,4118.48 3280.01,4118.91 3280.01,4140.01 3305.18,4165.18 3305.18,4175.18 v2(3308.05,4178.05) ; U3.21 3618.31,2660.16 3635.25,2643.22 3803.57,2643.22 3808.68,2648.32 ; v2(3657.5,3730) 3657.5,3725.94 3650,3718.44 3650,3450 3844,3256 3844,2746.17 3810.31,2712.48 3810.31,2690.41
  Bottom Layer w10: v2(3308.05,4178.05) 3308.05,4143.16 3635,3816.21 3635,3815 3657.5,3792.5 v2(3657.5,3730)
RES: C18.2 U3.24 | length 92.2
  Top Layer w10: C18.2 3536.82,2787.59 U3.24
SS: C20.2 U3.22 | length 121.7
  Top Layer w10: U3.22 3620.63,2679.84 3620.78,2679.69 3639.77,2679.69 3640.68,2678.78 3645.63,2678.78 C20.2
SW: C17.1 L2.1 Q2.3 Q3.2 R4.1 U3.12 | length 1356.1
  Top Layer w10: Q3.2 2914.8,2704.8 3044.61,2575 3240.59,2575 3290.59,2625 3340.67,2625 3344.88,2620.79 U3.12 ; L2.1@2950,2328.35 3015.87,2394.21 3104.21,2394.21 3137.68,2427.68 3137.68,2436.3 3142.27,2440.89 R4.1@3150.89,2440.89
  Top Layer w100: Q3.2 2889.61,2679.61 2789.61,2579.61 Q2.3 2793.54,2526.07 2793.54,2484.81 2929.13,2349.21 2929.13,2335.43 L2.1
SWCLK: CP3.1 U2.37 | length 318.9
  Top Layer w10: CP3.1 3010,3720 3218.09,3720 3221.73,3723.64 U2.37
SWDIO: CP2.1 U2.34 | length 806.2
  Top Layer w10: CP2.1 3042.75,3662.75 3022.75,3662.75 2970,3610 2840,3610 2800,3650 2800,3757.43 2893.68,3851.1 U2.34
VCC: C15.2 C16.2 D1.1 U3.10 | length 287
  Top Layer w10: D1.1 3169.37,2757.56 3169.37,2740.63 3216.81,2693.19 3231.22,2693.19 C15.2 C16.2 3308.78,2693.19 3327.47,2693.19 3328.53,2694.25 3360.72,2662.07 3366.17,2662.07 3366.62,2662.07 3368.53,2660.16 U3.10 ; C15.2@3237.87,2694.25 C15.2@3238.93,2693.19
VDDA: C27.2 R10.2 U3.2 U3.5 U3.6 | length 483.3
  Top Layer w7: C27.2 3485.9,2830.31 3577.93,2830.31 3597.62,2850 3702.59,2850 3726.38,2826.21 R10.2 ; U3.2 3489.53,2777.61
  Top Layer w20: 3415.94,2738.2 3418.76,2738.2 3425.25,2738.2 ; 3420,2750 3420,2764.41 C27.2 ; C27.2@3467.26,2797.15 C27.2 ; 3489.53,2777.61 3466.5,2800.63 3463.78,2800.63 C27.2
VIN: C11.2 C12.2 L1.1 S_PAD13.1 U3.15 | length 1346.3
  Top Layer w10: L1.1@2950,3114.57 2950,2900 3025,2825 3311.64,2825 3317.63,2830.98 3319.42,2830.98 3325.94,2837.5 v2(3330,2837.5) ; v2(3411.78,2548.22) 3414.25,2550.68 3428.21,2550.68 3449.93,2572.4 U3.15@3449.93,2578.3
  Top Layer w100: S_PAD13.1 2775,3275 2871.65,3275 L1.1@2958.33,3188.33 ; L1.1@2910,3140 2975.43,3140 L1.1
  Bottom Layer w10: v2(3330,2837.5) 3330,2833.44 3325,2828.44 3325,2635 v2(3411.78,2548.22)
VOUT: C21.2 C22.2 C23.2 C24.2 L2.2 R6.2 S_PAD10.1 S_PAD12.1 S_PAD15.1 U3.16 U3.17 | length 2585.8
  Top Layer w10: 3215.53,2112.62 3210,2118.15 3210,2184.41 3215.53,2189.94 ; v2(3230,2400) 3234.06,2400 3238.47,2404.41 C21.2 3429.91,2404.41 3440.5,2415 3504.5,2415 3529.5,2440 R6.2 ; 3320,1910 3343.46,1886.54 3357.6,1886.54 3390,1854.14 C24.2
  Top Layer w20: v2(3220,2500) 3409.53,2500 3480,2570.47 3480,2590 ; v2(3230,2400) 3215.53,2385.53 3215.53,2189.94 3215.53,2112.62 3320,2008.15 3320,1910
  Top Layer w100: L2.2 2950,1880.69 2970.87,1859.82 3381.52,1859.82 C24.2 ; C24.2@3402.6,1850 3620,1850 ; 3620,1910 3620,1850 ; S_PAD15.1@3730,1845 3725,1845 3720,1850 3620,1850 ; S_PAD15.1 3800,1770 3869,1770 S_PAD12.1 ; S_PAD15.1@3775,1845 3800.15,1845 3818.15,1863 3875,1863 S_PAD10.1
  Bottom Layer w20: v2(3220,2500) 3220,2498.65 3230,2488.65 v2(3230,2400)
pads on no net: J1.3 J1.6 J1.7 J1.8 J1.9 J1.10 J1.13 R8.1 U2.2 U2.3 U2.4 U2.5 U2.6 U2.7 U2.10 U2.11 U2.12 U2.14 U2.15 U2.17 U2.18 U2.19 U2.20 U2.25 U2.26 U2.27 U2.28 U2.30 U2.32 U2.33 U2.38 U2.39 U2.40 U2.42 U2.43 U2.44 U2.45 U2.46 U3.4

## Polygon pours and split planes (outlines as drawn)
GND on Top Layer "NONET_L-01_P-001" (solid, remove dead copper, pour order 0): 2260,3955 2260,4435 3525,4435 3940,4020 3940,3415 3940,1700 2615,1700 2615,3600
GND on Bottom Layer "NONET_L-01_P-001" (solid, pour order 1): 2273.33,3953.6 2273.33,4433.6 3538.33,4433.6 3953.33,4018.6 3953.33,3413.6 3953.33,1698.6 2628.33,1698.6 2628.33,3598.6

## Keep-outs
Keep-Out Layer:
  lines w5: 2270,3955 2270,4067.5 2270,4312.5 2270,4435 2700,4435 3535,4435 3950,4020 3950,3415 3950,1700 2625,1700 2625,3600 2270,3955

## Silkscreen, mask and mechanical layers (free items; w line width, h text height)
Top Overlay:
  lines w15: 2810,3550 3200,3550 3200,3740 2810,3740 2810,3550 ; 3480,2360 3800,2360 3800,2510 3480,2510 3480,2360 ; 3630,2720 3630,2870 3855,2870 3855,2720 3630,2720
  text "DEBUG" at 2817,3757 h40
  text "IO" at 3073,3587 h20 r90
  text "3V3" at 2863,3577 h20 r90
  text "CLK" at 2973,3577 h20 r90
  text "GND" at 3173,3577 h20 r90
  text "SOLDER SHORT IF INDUCTOR NOT APPLIED" at 3250,3030 h25 r90
  text "HARD ENABLE" at 3950,2720 h25 r90
  text "VOUT" at 3523,2417 h20 r90
  text "GND" at 3783,2417 h20 r90
  text "SET OUTPUT VOLTAGE" at 3650,2250 h30
Mechanical 1:
  lines w5: 2875,3425 cw(c2875,3475) 2875,3525 3125,3525 cw(c3125,3475) 3125,3425 2875,3425

## Dimensions
3535,4360 to 4325,4395 on Mechanical 1
3025,4365 to 2625,4350 on Mechanical 1
2165,4380 to 1990,3465 on Mechanical 1
3025,4360 to 2165,4380 on Mechanical 1